# EAGLE board Type-C_Panelized (EAGLE 9.5.2)
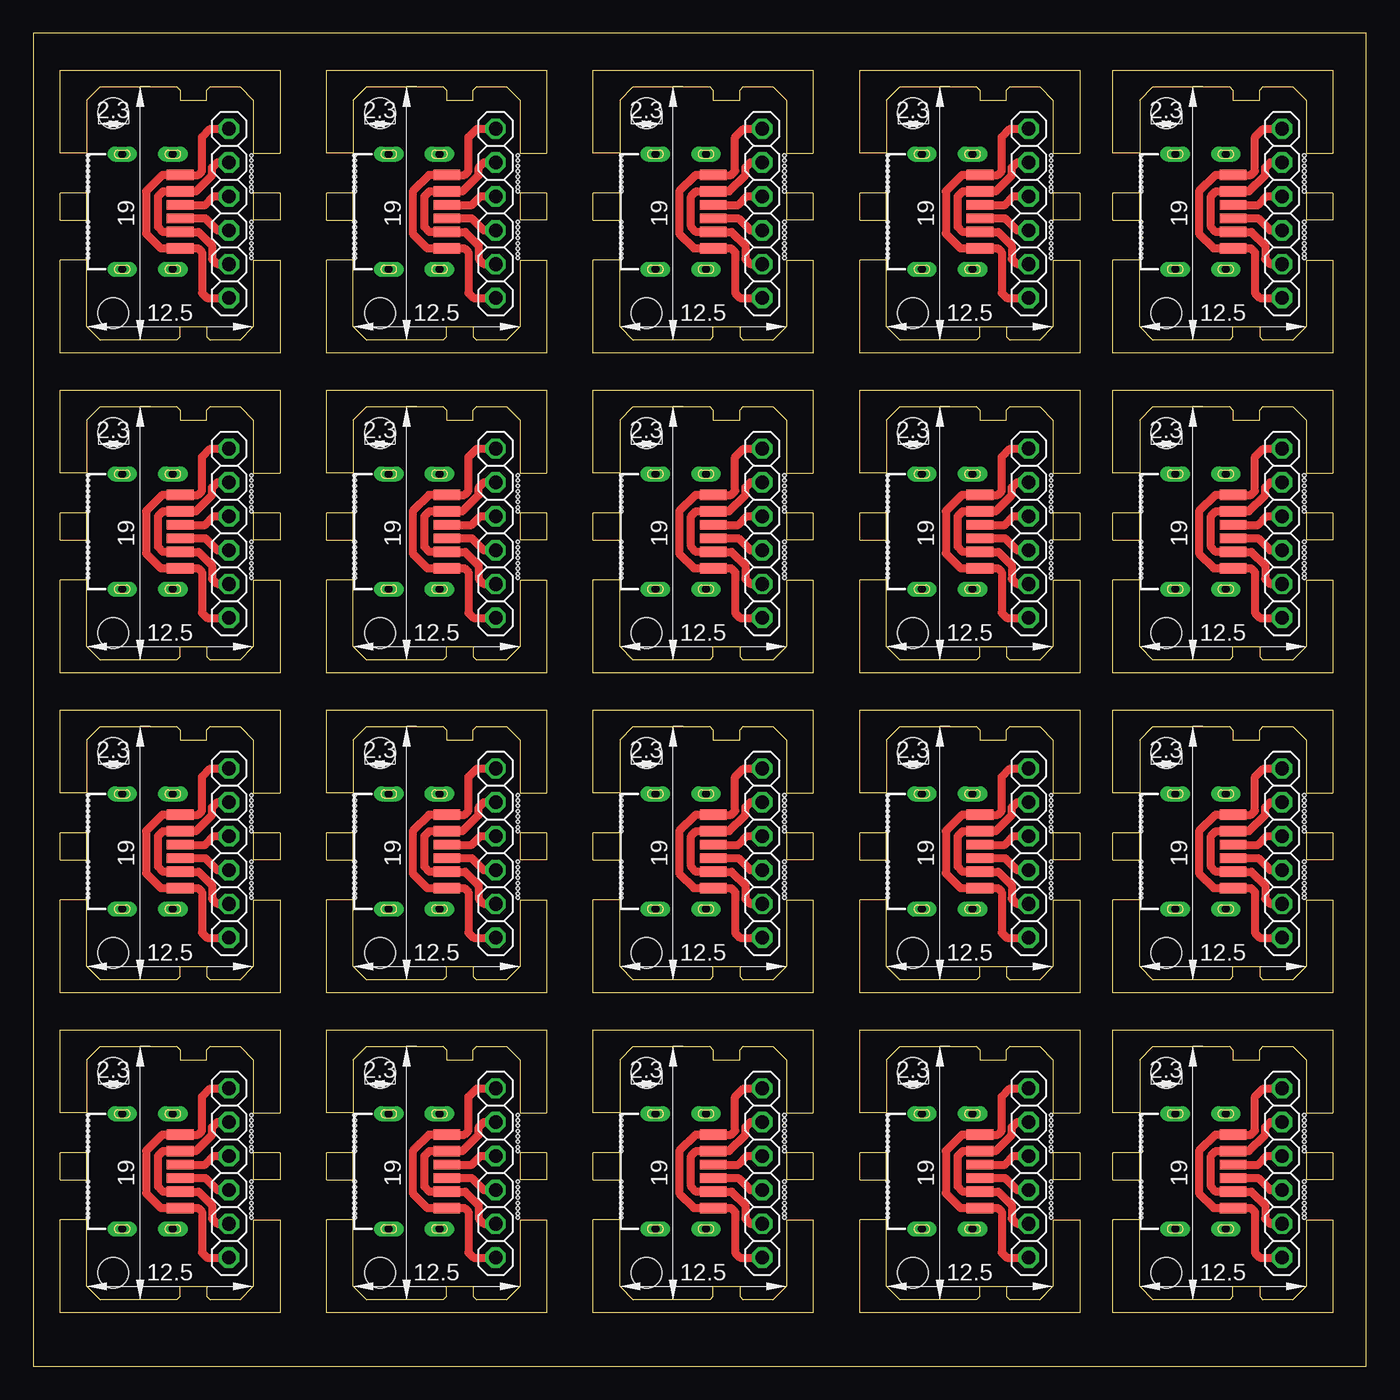
[diagram p0: board, top side]
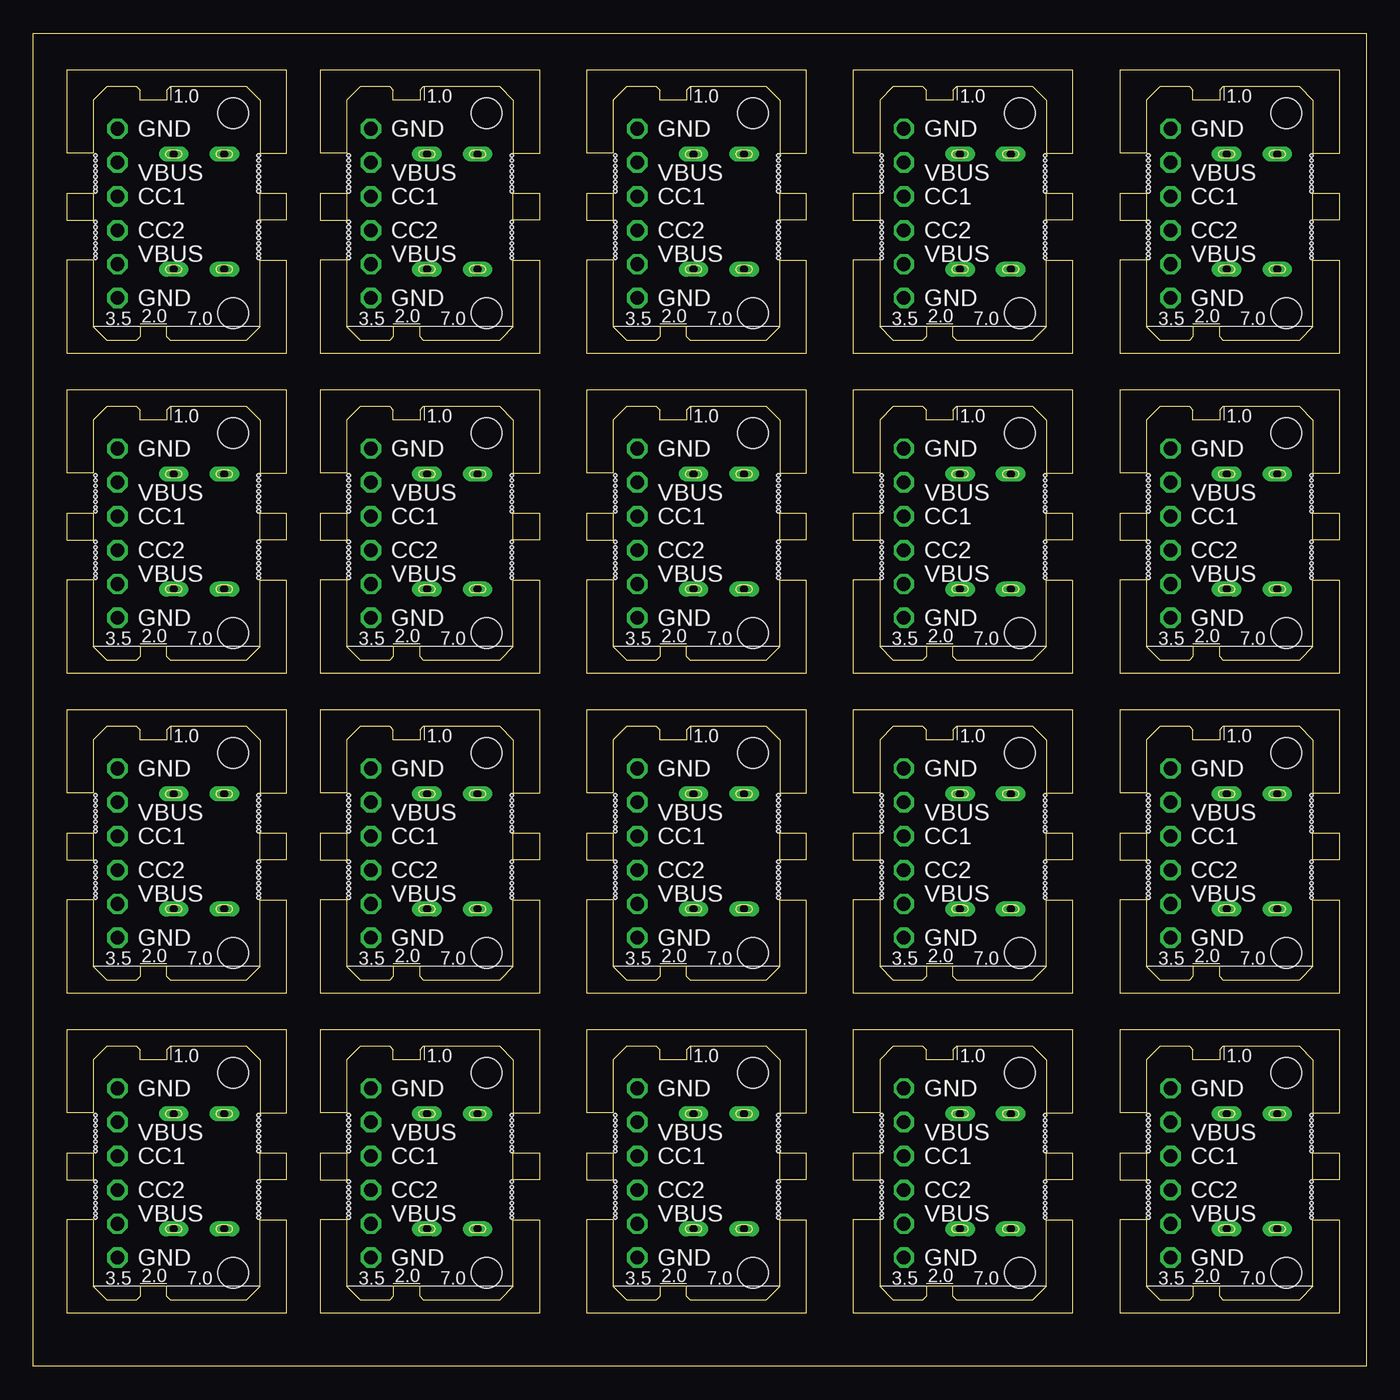
[diagram p1: board, bottom side, seen from below]

Size 100 x 100 mm. Coordinates in mm from the lower left corner, seen from the top.
Outline: 4,78 4,83 2,83 2,76.02 18.5,76.02 18.5,83 16.5,83 16.5,78 15.5,77 13.25,77 13,77.25 13,78 11,78 11,77.25 10.75,77 5,77 4,78
Outline: 4,86 4,88 2,88 2,86 4,86
Outline: 5,96 10.75,96 11,95.75 11,95 13,95 13,95.75 13.25,96 15.5,96 16.5,95 16.5,91 18.5,91 18.5,97.25 2,97.25 2,91 4,91 4,95 5,96
Outline: 16.5,88 16.5,86 18.5,86 18.5,88 16.5,88
Outline: 0,0 100,0 100,100 0,100 0,0
Outline: 24,78 24,83 22,83 22,76.02 38.5,76.02 38.5,83 36.5,83 36.5,78 35.5,77 33.25,77 33,77.25 33,78 31,78 31,77.25 30.75,77 25,77 24,78
Outline: 24,86 24,88 22,88 22,86 24,86
Outline: 25,96 30.75,96 31,95.75 31,95 33,95 33,95.75 33.25,96 35.5,96 36.5,95 36.5,91 38.5,91 38.5,97.25 22,97.25 22,91 24,91 24,95 25,96
Outline: 36.5,88 36.5,86 38.5,86 38.5,88 36.5,88
Outline: 44,78 44,83 42,83 42,76.02 58.5,76.02 58.5,83 56.5,83 56.5,78 55.5,77 53.25,77 53,77.25 53,78 51,78 51,77.25 50.75,77 45,77 44,78
Outline: 44,86 44,88 42,88 42,86 44,86
Outline: 45,96 50.75,96 51,95.75 51,95 53,95 53,95.75 53.25,96 55.5,96 56.5,95 56.5,91 58.5,91 58.5,97.25 42,97.25 42,91 44,91 44,95 45,96
Outline: 56.5,88 56.5,86 58.5,86 58.5,88 56.5,88
Outline: 64,78 64,83 62,83 62,76.02 78.5,76.02 78.5,83 76.5,83 76.5,78 75.5,77 73.25,77 73,77.25 73,78 71,78 71,77.25 70.75,77 65,77 64,78
Outline: 64,86 64,88 62,88 62,86 64,86
Outline: 65,96 70.75,96 71,95.75 71,95 73,95 73,95.75 73.25,96 75.5,96 76.5,95 76.5,91 78.5,91 78.5,97.25 62,97.25 62,91 64,91 64,95 65,96
Outline: 76.5,88 76.5,86 78.5,86 78.5,88 76.5,88
Outline: 83,78 83,83 81,83 81,76.02 97.5,76.02 97.5,83 95.5,83 95.5,78 94.5,77 92.25,77 92,77.25 92,78 90,78 90,77.25 89.75,77 84,77 83,78
Outline: 83,86 83,88 81,88 81,86 83,86
Outline: 84,96 89.75,96 90,95.75 90,95 92,95 92,95.75 92.25,96 94.5,96 95.5,95 95.5,91 97.5,91 97.5,97.25 81,97.25 81,91 83,91 83,95 84,96
Outline: 95.5,88 95.5,86 97.5,86 97.5,88 95.5,88
Outline: 4,54 4,59 2,59 2,52.02 18.5,52.02 18.5,59 16.5,59 16.5,54 15.5,53 13.25,53 13,53.25 13,54 11,54 11,53.25 10.75,53 5,53 4,54
Outline: 4,62 4,64 2,64 2,62 4,62
Outline: 5,72 10.75,72 11,71.75 11,71 13,71 13,71.75 13.25,72 15.5,72 16.5,71 16.5,67 18.5,67 18.5,73.25 2,73.25 2,67 4,67 4,71 5,72
Outline: 16.5,64 16.5,62 18.5,62 18.5,64 16.5,64
Outline: 24,54 24,59 22,59 22,52.02 38.5,52.02 38.5,59 36.5,59 36.5,54 35.5,53 33.25,53 33,53.25 33,54 31,54 31,53.25 30.75,53 25,53 24,54
Outline: 24,62 24,64 22,64 22,62 24,62
Outline: 25,72 30.75,72 31,71.75 31,71 33,71 33,71.75 33.25,72 35.5,72 36.5,71 36.5,67 38.5,67 38.5,73.25 22,73.25 22,67 24,67 24,71 25,72
Outline: 36.5,64 36.5,62 38.5,62 38.5,64 36.5,64
Outline: 44,54 44,59 42,59 42,52.02 58.5,52.02 58.5,59 56.5,59 56.5,54 55.5,53 53.25,53 53,53.25 53,54 51,54 51,53.25 50.75,53 45,53 44,54
Outline: 44,62 44,64 42,64 42,62 44,62
Outline: 45,72 50.75,72 51,71.75 51,71 53,71 53,71.75 53.25,72 55.5,72 56.5,71 56.5,67 58.5,67 58.5,73.25 42,73.25 42,67 44,67 44,71 45,72
Outline: 56.5,64 56.5,62 58.5,62 58.5,64 56.5,64
Outline: 64,54 64,59 62,59 62,52.02 78.5,52.02 78.5,59 76.5,59 76.5,54 75.5,53 73.25,53 73,53.25 73,54 71,54 71,53.25 70.75,53 65,53 64,54
Outline: 64,62 64,64 62,64 62,62 64,62
Outline: 65,72 70.75,72 71,71.75 71,71 73,71 73,71.75 73.25,72 75.5,72 76.5,71 76.5,67 78.5,67 78.5,73.25 62,73.25 62,67 64,67 64,71 65,72
Outline: 76.5,64 76.5,62 78.5,62 78.5,64 76.5,64
Outline: 83,54 83,59 81,59 81,52.02 97.5,52.02 97.5,59 95.5,59 95.5,54 94.5,53 92.25,53 92,53.25 92,54 90,54 90,53.25 89.75,53 84,53 83,54
Outline: 83,62 83,64 81,64 81,62 83,62
Outline: 84,72 89.75,72 90,71.75 90,71 92,71 92,71.75 92.25,72 94.5,72 95.5,71 95.5,67 97.5,67 97.5,73.25 81,73.25 81,67 83,67 83,71 84,72
Outline: 95.5,64 95.5,62 97.5,62 97.5,64 95.5,64
Outline: 4,30 4,35 2,35 2,28.02 18.5,28.02 18.5,35 16.5,35 16.5,30 15.5,29 13.25,29 13,29.25 13,30 11,30 11,29.25 10.75,29 5,29 4,30
Outline: 4,38 4,40 2,40 2,38 4,38
Outline: 5,48 10.75,48 11,47.75 11,47 13,47 13,47.75 13.25,48 15.5,48 16.5,47 16.5,43 18.5,43 18.5,49.25 2,49.25 2,43 4,43 4,47 5,48
Outline: 16.5,40 16.5,38 18.5,38 18.5,40 16.5,40
Outline: 24,30 24,35 22,35 22,28.02 38.5,28.02 38.5,35 36.5,35 36.5,30 35.5,29 33.25,29 33,29.25 33,30 31,30 31,29.25 30.75,29 25,29 24,30
Outline: 24,38 24,40 22,40 22,38 24,38
Outline: 25,48 30.75,48 31,47.75 31,47 33,47 33,47.75 33.25,48 35.5,48 36.5,47 36.5,43 38.5,43 38.5,49.25 22,49.25 22,43 24,43 24,47 25,48
Outline: 36.5,40 36.5,38 38.5,38 38.5,40 36.5,40
Outline: 44,30 44,35 42,35 42,28.02 58.5,28.02 58.5,35 56.5,35 56.5,30 55.5,29 53.25,29 53,29.25 53,30 51,30 51,29.25 50.75,29 45,29 44,30
Outline: 44,38 44,40 42,40 42,38 44,38
Outline: 45,48 50.75,48 51,47.75 51,47 53,47 53,47.75 53.25,48 55.5,48 56.5,47 56.5,43 58.5,43 58.5,49.25 42,49.25 42,43 44,43 44,47 45,48
Outline: 56.5,40 56.5,38 58.5,38 58.5,40 56.5,40
Outline: 64,30 64,35 62,35 62,28.02 78.5,28.02 78.5,35 76.5,35 76.5,30 75.5,29 73.25,29 73,29.25 73,30 71,30 71,29.25 70.75,29 65,29 64,30
Outline: 64,38 64,40 62,40 62,38 64,38
Outline: 65,48 70.75,48 71,47.75 71,47 73,47 73,47.75 73.25,48 75.5,48 76.5,47 76.5,43 78.5,43 78.5,49.25 62,49.25 62,43 64,43 64,47 65,48
Outline: 76.5,40 76.5,38 78.5,38 78.5,40 76.5,40
Outline: 83,30 83,35 81,35 81,28.02 97.5,28.02 97.5,35 95.5,35 95.5,30 94.5,29 92.25,29 92,29.25 92,30 90,30 90,29.25 89.75,29 84,29 83,30
Outline: 83,38 83,40 81,40 81,38 83,38
Outline: 84,48 89.75,48 90,47.75 90,47 92,47 92,47.75 92.25,48 94.5,48 95.5,47 95.5,43 97.5,43 97.5,49.25 81,49.25 81,43 83,43 83,47 84,48
Outline: 95.5,40 95.5,38 97.5,38 97.5,40 95.5,40
Outline: 4,6 4,11 2,11 2,4.02 18.5,4.02 18.5,11 16.5,11 16.5,6 15.5,5 13.25,5 13,5.25 13,6 11,6 11,5.25 10.75,5 5,5 4,6
Outline: 4,14 4,16 2,16 2,14 4,14
Outline: 5,24 10.75,24 11,23.75 11,23 13,23 13,23.75 13.25,24 15.5,24 16.5,23 16.5,19 18.5,19 18.5,25.25 2,25.25 2,19 4,19 4,23 5,24
Outline: 16.5,16 16.5,14 18.5,14 18.5,16 16.5,16
Outline: 24,6 24,11 22,11 22,4.02 38.5,4.02 38.5,11 36.5,11 36.5,6 35.5,5 33.25,5 33,5.25 33,6 31,6 31,5.25 30.75,5 25,5 24,6
Outline: 24,14 24,16 22,16 22,14 24,14
Outline: 25,24 30.75,24 31,23.75 31,23 33,23 33,23.75 33.25,24 35.5,24 36.5,23 36.5,19 38.5,19 38.5,25.25 22,25.25 22,19 24,19 24,23 25,24
Outline: 36.5,16 36.5,14 38.5,14 38.5,16 36.5,16
Outline: 44,6 44,11 42,11 42,4.02 58.5,4.02 58.5,11 56.5,11 56.5,6 55.5,5 53.25,5 53,5.25 53,6 51,6 51,5.25 50.75,5 45,5 44,6
Outline: 44,14 44,16 42,16 42,14 44,14
Outline: 45,24 50.75,24 51,23.75 51,23 53,23 53,23.75 53.25,24 55.5,24 56.5,23 56.5,19 58.5,19 58.5,25.25 42,25.25 42,19 44,19 44,23 45,24
Outline: 56.5,16 56.5,14 58.5,14 58.5,16 56.5,16
Outline: 64,6 64,11 62,11 62,4.02 78.5,4.02 78.5,11 76.5,11 76.5,6 75.5,5 73.25,5 73,5.25 73,6 71,6 71,5.25 70.75,5 65,5 64,6
Outline: 64,14 64,16 62,16 62,14 64,14
Outline: 65,24 70.75,24 71,23.75 71,23 73,23 73,23.75 73.25,24 75.5,24 76.5,23 76.5,19 78.5,19 78.5,25.25 62,25.25 62,19 64,19 64,23 65,24
Outline: 76.5,16 76.5,14 78.5,14 78.5,16 76.5,16
Outline: 83,6 83,11 81,11 81,4.02 97.5,4.02 97.5,11 95.5,11 95.5,6 94.5,5 92.25,5 92,5.25 92,6 90,6 90,5.25 89.75,5 84,5 83,6
Outline: 83,14 83,16 81,16 81,14 83,14
Outline: 84,24 89.75,24 90,23.75 90,23 92,23 92,23.75 92.25,24 94.5,24 95.5,23 95.5,19 97.5,19 97.5,25.25 81,25.25 81,19 83,19 83,23 84,24
Outline: 95.5,16 95.5,14 97.5,14 97.5,16 95.5,16
Copper layers (1*16): Top 0.035mm / dielectric 1.5mm / Bottom 0.035mm
Design rules "default *": minimum track width 6mil, minimum drill 0.35mm, track to track 6mil, track to pad 6mil, pad to pad 6mil, via to via 6mil, smd to smd 6mil, copper to edge 4mil, drill to drill 6mil, minimum pad ring 10mil, minimum via ring 8mil, stop-mask expansion 4mil, vias tented up to drill 0mil, thermal gap 10mil
Holes 2.3 mm at 6,94 6,79 26,94 26,79 46,94 46,79 66,94 66,79 85,94 85,79 6,70 6,55 26,70 26,55 46,70 46,55 66,70 66,55 85,70 85,55 6,46 6,31 26,46 26,31 46,46 46,31 66,46 66,31 85,46 85,31 6,22 6,7 26,22 26,7 46,22 46,7 66,22 66,7 85,22 85,7
Holes 0.25 mm at 4.1,90.85 4.1,90.45 4.1,90.05 4.1,89.65 4.1,89.25 4.1,88.85 4.1,88.45 4.1,88.15 4.1,85.85 4.1,85.45 4.1,85.05 4.1,84.65 4.1,84.25 4.1,83.85 4.1,83.45 4.1,83.15 16.35,90.85 16.35,90.45 16.35,90.05 16.35,89.65 16.35,89.25 16.35,88.85 16.35,88.45 16.35,88.15 16.35,85.85 16.35,85.45 16.35,85.05 16.35,84.65 16.35,84.25 16.35,83.85 16.35,83.45 16.35,83.15 24.1,90.85 24.1,90.45 24.1,90.05 24.1,89.65 24.1,89.25 24.1,88.85 24.1,88.45 24.1,88.15 24.1,85.85 24.1,85.45 24.1,85.05 24.1,84.65 24.1,84.25 24.1,83.85 24.1,83.45 24.1,83.15 36.35,90.85 36.35,90.45 36.35,90.05 36.35,89.65 36.35,89.25 36.35,88.85 36.35,88.45 36.35,88.15 36.35,85.85 36.35,85.45 36.35,85.05 36.35,84.65 36.35,84.25 36.35,83.85 36.35,83.45 36.35,83.15 44.1,90.85 44.1,90.45 44.1,90.05 44.1,89.65 44.1,89.25 44.1,88.85 44.1,88.45 44.1,88.15 44.1,85.85 44.1,85.45 44.1,85.05 44.1,84.65 44.1,84.25 44.1,83.85 44.1,83.45 44.1,83.15 56.35,90.85 56.35,90.45 56.35,90.05 56.35,89.65 56.35,89.25 56.35,88.85 56.35,88.45 56.35,88.15 56.35,85.85 56.35,85.45 56.35,85.05 56.35,84.65 56.35,84.25 56.35,83.85 56.35,83.45 56.35,83.15 64.1,90.85 64.1,90.45 64.1,90.05 64.1,89.65 64.1,89.25 64.1,88.85 64.1,88.45 64.1,88.15 64.1,85.85 64.1,85.45 64.1,85.05 64.1,84.65 64.1,84.25 64.1,83.85 64.1,83.45 64.1,83.15 76.35,90.85 76.35,90.45 76.35,90.05 76.35,89.65 76.35,89.25 76.35,88.85 76.35,88.45 76.35,88.15 76.35,85.85 76.35,85.45 76.35,85.05 76.35,84.65 76.35,84.25 76.35,83.85 76.35,83.45 76.35,83.15 83.1,90.85 83.1,90.45 83.1,90.05 83.1,89.65 83.1,89.25 83.1,88.85 83.1,88.45 83.1,88.15 83.1,85.85 83.1,85.45 83.1,85.05 83.1,84.65 83.1,84.25 83.1,83.85 83.1,83.45 83.1,83.15 95.35,90.85 95.35,90.45 95.35,90.05 95.35,89.65 95.35,89.25 95.35,88.85 95.35,88.45 95.35,88.15 95.35,85.85 95.35,85.45 95.35,85.05 95.35,84.65 95.35,84.25 95.35,83.85 95.35,83.45 95.35,83.15 4.1,66.85 4.1,66.45 4.1,66.05 4.1,65.65 4.1,65.25 4.1,64.85 4.1,64.45 4.1,64.15 4.1,61.85 4.1,61.45 4.1,61.05 4.1,60.65 4.1,60.25 4.1,59.85 4.1,59.45 4.1,59.15 16.35,66.85 16.35,66.45 16.35,66.05 16.35,65.65 16.35,65.25 16.35,64.85 16.35,64.45 16.35,64.15 16.35,61.85 16.35,61.45 16.35,61.05 16.35,60.65 16.35,60.25 16.35,59.85 16.35,59.45 16.35,59.15 24.1,66.85 24.1,66.45 24.1,66.05 24.1,65.65 24.1,65.25 24.1,64.85 24.1,64.45 24.1,64.15 24.1,61.85 24.1,61.45 24.1,61.05 24.1,60.65 24.1,60.25 24.1,59.85 24.1,59.45 24.1,59.15 36.35,66.85 36.35,66.45 36.35,66.05 36.35,65.65 36.35,65.25 36.35,64.85 36.35,64.45 36.35,64.15 36.35,61.85 36.35,61.45 36.35,61.05 36.35,60.65 36.35,60.25 36.35,59.85 36.35,59.45 36.35,59.15 44.1,66.85 44.1,66.45 44.1,66.05 44.1,65.65 44.1,65.25 44.1,64.85 44.1,64.45 44.1,64.15 44.1,61.85 44.1,61.45 44.1,61.05 44.1,60.65 44.1,60.25 44.1,59.85 44.1,59.45 44.1,59.15 56.35,66.85 56.35,66.45 56.35,66.05 56.35,65.65 56.35,65.25 56.35,64.85 56.35,64.45 56.35,64.15 56.35,61.85 56.35,61.45 56.35,61.05 56.35,60.65 56.35,60.25 56.35,59.85 56.35,59.45 56.35,59.15 64.1,66.85 64.1,66.45 64.1,66.05 64.1,65.65 64.1,65.25 64.1,64.85 64.1,64.45 64.1,64.15 64.1,61.85 64.1,61.45 64.1,61.05 64.1,60.65 64.1,60.25 64.1,59.85 64.1,59.45 64.1,59.15 76.35,66.85 76.35,66.45 76.35,66.05 76.35,65.65 76.35,65.25 76.35,64.85 76.35,64.45 76.35,64.15 76.35,61.85 76.35,61.45 76.35,61.05 76.35,60.65 76.35,60.25 76.35,59.85 76.35,59.45 76.35,59.15 83.1,66.85 83.1,66.45 83.1,66.05 83.1,65.65 83.1,65.25 83.1,64.85 83.1,64.45 83.1,64.15 83.1,61.85 83.1,61.45 83.1,61.05 83.1,60.65 83.1,60.25 83.1,59.85 83.1,59.45 83.1,59.15 95.35,66.85 95.35,66.45 95.35,66.05 95.35,65.65 95.35,65.25 95.35,64.85 95.35,64.45 95.35,64.15 95.35,61.85 95.35,61.45 95.35,61.05 95.35,60.65 95.35,60.25 95.35,59.85 95.35,59.45 95.35,59.15 4.1,42.85 4.1,42.45 4.1,42.05 4.1,41.65 4.1,41.25 4.1,40.85 4.1,40.45 4.1,40.15 4.1,37.85 4.1,37.45 4.1,37.05 4.1,36.65 4.1,36.25 4.1,35.85 4.1,35.45 4.1,35.15 16.35,42.85 16.35,42.45 16.35,42.05 16.35,41.65 16.35,41.25 16.35,40.85 16.35,40.45 16.35,40.15 16.35,37.85 16.35,37.45 16.35,37.05 16.35,36.65 16.35,36.25 16.35,35.85 16.35,35.45 16.35,35.15 24.1,42.85 24.1,42.45 24.1,42.05 24.1,41.65 24.1,41.25 24.1,40.85 24.1,40.45 24.1,40.15 24.1,37.85 24.1,37.45 24.1,37.05 24.1,36.65 24.1,36.25 24.1,35.85 24.1,35.45 24.1,35.15 36.35,42.85 36.35,42.45 36.35,42.05 36.35,41.65 36.35,41.25 36.35,40.85 36.35,40.45 36.35,40.15 36.35,37.85 36.35,37.45 36.35,37.05 36.35,36.65 36.35,36.25 36.35,35.85 36.35,35.45 36.35,35.15 44.1,42.85 44.1,42.45 44.1,42.05 44.1,41.65 44.1,41.25 44.1,40.85 44.1,40.45 44.1,40.15 44.1,37.85 44.1,37.45 44.1,37.05 44.1,36.65 44.1,36.25 44.1,35.85 44.1,35.45 44.1,35.15 56.35,42.85 56.35,42.45 56.35,42.05 56.35,41.65 56.35,41.25 56.35,40.85 56.35,40.45 56.35,40.15 56.35,37.85 56.35,37.45 56.35,37.05 56.35,36.65 56.35,36.25 56.35,35.85 56.35,35.45 56.35,35.15 64.1,42.85 64.1,42.45 64.1,42.05 64.1,41.65 64.1,41.25 64.1,40.85 64.1,40.45 64.1,40.15 64.1,37.85 64.1,37.45 64.1,37.05 64.1,36.65 64.1,36.25 64.1,35.85 64.1,35.45 64.1,35.15 76.35,42.85 76.35,42.45 76.35,42.05 76.35,41.65 76.35,41.25 76.35,40.85 76.35,40.45 76.35,40.15 76.35,37.85 76.35,37.45 76.35,37.05 76.35,36.65 76.35,36.25 76.35,35.85 76.35,35.45 76.35,35.15 83.1,42.85 83.1,42.45 83.1,42.05 83.1,41.65 83.1,41.25 83.1,40.85 83.1,40.45 83.1,40.15 83.1,37.85 83.1,37.45 83.1,37.05 83.1,36.65 83.1,36.25 83.1,35.85 83.1,35.45 83.1,35.15 95.35,42.85 95.35,42.45 95.35,42.05 95.35,41.65 95.35,41.25 95.35,40.85 95.35,40.45 95.35,40.15 95.35,37.85 95.35,37.45 95.35,37.05 95.35,36.65 95.35,36.25 95.35,35.85 95.35,35.45 95.35,35.15 4.1,18.85 4.1,18.45 4.1,18.05 4.1,17.65 4.1,17.25 4.1,16.85 4.1,16.45 4.1,16.15 4.1,13.85 4.1,13.45 4.1,13.05 4.1,12.65 4.1,12.25 4.1,11.85 4.1,11.45 4.1,11.15 16.35,18.85 16.35,18.45 16.35,18.05 16.35,17.65 16.35,17.25 16.35,16.85 16.35,16.45 16.35,16.15 16.35,13.85 16.35,13.45 16.35,13.05 16.35,12.65 16.35,12.25 16.35,11.85 16.35,11.45 16.35,11.15 24.1,18.85 24.1,18.45 24.1,18.05 24.1,17.65 24.1,17.25 24.1,16.85 24.1,16.45 24.1,16.15 24.1,13.85 24.1,13.45 24.1,13.05 24.1,12.65 24.1,12.25 24.1,11.85 24.1,11.45 24.1,11.15 36.35,18.85 36.35,18.45 36.35,18.05 36.35,17.65 36.35,17.25 36.35,16.85 36.35,16.45 36.35,16.15 36.35,13.85 36.35,13.45 36.35,13.05 36.35,12.65 36.35,12.25 36.35,11.85 36.35,11.45 36.35,11.15 44.1,18.85 44.1,18.45 44.1,18.05 44.1,17.65 44.1,17.25 44.1,16.85 44.1,16.45 44.1,16.15 44.1,13.85 44.1,13.45 44.1,13.05 44.1,12.65 44.1,12.25 44.1,11.85 44.1,11.45 44.1,11.15 56.35,18.85 56.35,18.45 56.35,18.05 56.35,17.65 56.35,17.25 56.35,16.85 56.35,16.45 56.35,16.15 56.35,13.85 56.35,13.45 56.35,13.05 56.35,12.65 56.35,12.25 56.35,11.85 56.35,11.45 56.35,11.15 64.1,18.85 64.1,18.45 64.1,18.05 64.1,17.65 64.1,17.25 64.1,16.85 64.1,16.45 64.1,16.15 64.1,13.85 64.1,13.45 64.1,13.05 64.1,12.65 64.1,12.25 64.1,11.85 64.1,11.45 64.1,11.15 76.35,18.85 76.35,18.45 76.35,18.05 76.35,17.65 76.35,17.25 76.35,16.85 76.35,16.45 76.35,16.15 76.35,13.85 76.35,13.45 76.35,13.05 76.35,12.65 76.35,12.25 76.35,11.85 76.35,11.45 76.35,11.15 83.1,18.85 83.1,18.45 83.1,18.05 83.1,17.65 83.1,17.25 83.1,16.85 83.1,16.45 83.1,16.15 83.1,13.85 83.1,13.45 83.1,13.05 83.1,12.65 83.1,12.25 83.1,11.85 83.1,11.45 83.1,11.15 95.35,18.85 95.35,18.45 95.35,18.05 95.35,17.65 95.35,17.25 95.35,16.85 95.35,16.45 95.35,16.15 95.35,13.85 95.35,13.45 95.35,13.05 95.35,12.65 95.35,12.25 95.35,11.85 95.35,11.45 95.35,11.15

## Footprints (pad centres in the part's own frame; a part is rotated, then mirrored left to right if it is on the bottom)
TYPE-C-31-M-17 = smd 0.7 x 2: CC1 -0.5,0.4; CC2 0.5,0.4 | smd 0.8 x 2: GND -2.75,0.4; GND_2 2.75,0.4 | drill 0.6 pad 1.1 long: P$1 4.32,-3.95; P$2 4.32,-0.15; P$3 -4.32,-0.15; P$4 -4.32,-3.95 | smd 0.76 x 2: VBUS -1.52,0.4; VBUS_2 1.52,0.4
1X06/OCT = drill 1.016 octagon: 1 -6.35,0; 2 -3.81,0; 3 -1.27,0; 4 1.27,0; 5 3.81,0; 6 6.35,0

## Placement (x,y rotation side)
J1  TYPE-C-31-M-17  [TYPE-C-31-M-17]  10.62,86.62 270 top
J2  TYPE-C-31-M-17  [TYPE-C-31-M-17]  30.62,86.62 270 top
J3  TYPE-C-31-M-17  [TYPE-C-31-M-17]  50.62,86.62 270 top
J4  TYPE-C-31-M-17  [TYPE-C-31-M-17]  70.62,86.62 270 top
J5  TYPE-C-31-M-17  [TYPE-C-31-M-17]  89.62,86.62 270 top
J6  TYPE-C-31-M-17  [TYPE-C-31-M-17]  10.62,62.62 270 top
J7  TYPE-C-31-M-17  [TYPE-C-31-M-17]  30.62,62.62 270 top
J8  TYPE-C-31-M-17  [TYPE-C-31-M-17]  50.62,62.62 270 top
J9  TYPE-C-31-M-17  [TYPE-C-31-M-17]  70.62,62.62 270 top
J10  TYPE-C-31-M-17  [TYPE-C-31-M-17]  89.62,62.62 270 top
J11  TYPE-C-31-M-17  [TYPE-C-31-M-17]  10.62,38.62 270 top
J12  TYPE-C-31-M-17  [TYPE-C-31-M-17]  30.62,38.62 270 top
J13  TYPE-C-31-M-17  [TYPE-C-31-M-17]  50.62,38.62 270 top
J14  TYPE-C-31-M-17  [TYPE-C-31-M-17]  70.62,38.62 270 top
J15  TYPE-C-31-M-17  [TYPE-C-31-M-17]  89.62,38.62 270 top
J16  TYPE-C-31-M-17  [TYPE-C-31-M-17]  10.62,14.62 270 top
J17  TYPE-C-31-M-17  [TYPE-C-31-M-17]  30.62,14.62 270 top
J18  TYPE-C-31-M-17  [TYPE-C-31-M-17]  50.62,14.62 270 top
J19  TYPE-C-31-M-17  [TYPE-C-31-M-17]  70.62,14.62 270 top
J20  TYPE-C-31-M-17  [TYPE-C-31-M-17]  89.62,14.62 270 top
JP1  [1X06/OCT]  14.68,86.49 90 top
JP2  [1X06/OCT]  34.68,86.49 90 top
JP3  [1X06/OCT]  54.68,86.49 90 top
JP4  [1X06/OCT]  74.68,86.49 90 top
JP5  [1X06/OCT]  93.68,86.49 90 top
JP6  [1X06/OCT]  14.68,62.49 90 top
JP7  [1X06/OCT]  34.68,62.49 90 top
JP8  [1X06/OCT]  54.68,62.49 90 top
JP9  [1X06/OCT]  74.68,62.49 90 top
JP10  [1X06/OCT]  93.68,62.49 90 top
JP11  [1X06/OCT]  14.68,38.49 90 top
JP12  [1X06/OCT]  34.68,38.49 90 top
JP13  [1X06/OCT]  54.68,38.49 90 top
JP14  [1X06/OCT]  74.68,38.49 90 top
JP15  [1X06/OCT]  93.68,38.49 90 top
JP16  [1X06/OCT]  14.68,14.49 90 top
JP17  [1X06/OCT]  34.68,14.49 90 top
JP18  [1X06/OCT]  54.68,14.49 90 top
JP19  [1X06/OCT]  74.68,14.49 90 top
JP20  [1X06/OCT]  93.68,14.49 90 top

## Library data of the parts
J1-J20 = angrypig7_Library
JP1-JP20 = pinhead_v2

## Nets
N$1: J1.VBUS J1.VBUS_2 JP1.2 JP1.5
N$2: J1.GND J1.GND_2 JP1.1 JP1.6
N$3: J1.CC1 JP1.4
N$4: J1.CC2 JP1.3
N$5: J2.VBUS J2.VBUS_2 JP2.2 JP2.5
N$6: J2.GND J2.GND_2 JP2.1 JP2.6
N$7: J2.CC1 JP2.4
N$8: J2.CC2 JP2.3
N$9: J3.VBUS J3.VBUS_2 JP3.2 JP3.5
N$10: J3.GND J3.GND_2 JP3.1 JP3.6
N$11: J3.CC1 JP3.4
N$12: J3.CC2 JP3.3
N$13: J4.VBUS J4.VBUS_2 JP4.2 JP4.5
N$14: J4.GND J4.GND_2 JP4.1 JP4.6
N$15: J4.CC1 JP4.4
N$16: J4.CC2 JP4.3
N$17: J5.VBUS J5.VBUS_2 JP5.2 JP5.5
N$18: J5.GND J5.GND_2 JP5.1 JP5.6
N$19: J5.CC1 JP5.4
N$20: J5.CC2 JP5.3
N$21: J6.VBUS J6.VBUS_2 JP6.2 JP6.5
N$22: J6.GND J6.GND_2 JP6.1 JP6.6
N$23: J6.CC1 JP6.4
N$24: J6.CC2 JP6.3
N$25: J7.VBUS J7.VBUS_2 JP7.2 JP7.5
N$26: J7.GND J7.GND_2 JP7.1 JP7.6
N$27: J7.CC1 JP7.4
N$28: J7.CC2 JP7.3
N$29: J8.VBUS J8.VBUS_2 JP8.2 JP8.5
N$30: J8.GND J8.GND_2 JP8.1 JP8.6
N$31: J8.CC1 JP8.4
N$32: J8.CC2 JP8.3
N$33: J9.VBUS J9.VBUS_2 JP9.2 JP9.5
N$34: J9.GND J9.GND_2 JP9.1 JP9.6
N$35: J9.CC1 JP9.4
N$36: J9.CC2 JP9.3
N$37: J10.VBUS J10.VBUS_2 JP10.2 JP10.5
N$38: J10.GND J10.GND_2 JP10.1 JP10.6
N$39: J10.CC1 JP10.4
N$40: J10.CC2 JP10.3
N$41: J11.VBUS J11.VBUS_2 JP11.2 JP11.5
N$42: J11.GND J11.GND_2 JP11.1 JP11.6
N$43: J11.CC1 JP11.4
N$44: J11.CC2 JP11.3
N$45: J12.VBUS J12.VBUS_2 JP12.2 JP12.5
N$46: J12.GND J12.GND_2 JP12.1 JP12.6
N$47: J12.CC1 JP12.4
N$48: J12.CC2 JP12.3
N$49: J13.VBUS J13.VBUS_2 JP13.2 JP13.5
N$50: J13.GND J13.GND_2 JP13.1 JP13.6
N$51: J13.CC1 JP13.4
N$52: J13.CC2 JP13.3
N$53: J14.VBUS J14.VBUS_2 JP14.2 JP14.5
N$54: J14.GND J14.GND_2 JP14.1 JP14.6
N$55: J14.CC1 JP14.4
N$56: J14.CC2 JP14.3
N$57: J15.VBUS J15.VBUS_2 JP15.2 JP15.5
N$58: J15.GND J15.GND_2 JP15.1 JP15.6
N$59: J15.CC1 JP15.4
N$60: J15.CC2 JP15.3
N$61: J16.VBUS J16.VBUS_2 JP16.2 JP16.5
N$62: J16.GND J16.GND_2 JP16.1 JP16.6
N$63: J16.CC1 JP16.4
N$64: J16.CC2 JP16.3
N$65: J17.VBUS J17.VBUS_2 JP17.2 JP17.5
N$66: J17.GND J17.GND_2 JP17.1 JP17.6
N$67: J17.CC1 JP17.4
N$68: J17.CC2 JP17.3
N$69: J18.VBUS J18.VBUS_2 JP18.2 JP18.5
N$70: J18.GND J18.GND_2 JP18.1 JP18.6
N$71: J18.CC1 JP18.4
N$72: J18.CC2 JP18.3
N$73: J19.VBUS J19.VBUS_2 JP19.2 JP19.5
N$74: J19.GND J19.GND_2 JP19.1 JP19.6
N$75: J19.CC1 JP19.4
N$76: J19.CC2 JP19.3
N$77: J20.VBUS J20.VBUS_2 JP20.2 JP20.5
N$78: J20.GND J20.GND_2 JP20.1 JP20.6
N$79: J20.CC1 JP20.4
N$80: J20.CC2 JP20.3

## Tracks (layer width: path | path; a pad name or v marks a point on that pad's centre or on a via)
N$1
  Top 0.61: JP1.2 13.79,82.68 13.41,83.06 13.41,84.08 12.39,85.1 J1.VBUS_2 9.73,85.1 9.35,85.48 9.35,87.76 9.73,88.14 J1.VBUS 12.2,88.14 13.41,89.35 13.41,89.92 13.79,90.3 JP1.5
N$2
  Top 0.61: JP1.1 13.03,80.14 12.65,80.52 12.65,83.57 12.35,83.87 J1.GND_2 9.56,83.87 8.46,84.97 8.46,88.14 9.69,89.37 J1.GND 12.35,89.37 12.65,89.67 12.65,92.21 13.29,92.84 JP1.6
N$3
  Top 0.61: J1.CC1 12.9,87.12 13.54,87.76 JP1.4
N$4
  Top 0.61: J1.CC2 12.9,86.12 13.79,85.22 JP1.3
N$5
  Top 0.61: JP2.2 33.8,82.68 33.41,83.06 33.41,84.08 32.39,85.1 J2.VBUS_2 29.73,85.1 29.35,85.48 29.35,87.76 29.73,88.14 J2.VBUS 32.2,88.14 33.41,89.35 33.41,89.92 33.8,90.3 JP2.5
N$6
  Top 0.61: JP2.1 33.03,80.14 32.65,80.52 32.65,83.57 32.35,83.87 J2.GND_2 29.56,83.87 28.46,84.97 28.46,88.14 29.69,89.37 J2.GND 32.35,89.37 32.65,89.67 32.65,92.21 33.29,92.84 JP2.6
N$7
  Top 0.61: J2.CC1 32.9,87.12 33.54,87.76 JP2.4
N$8
  Top 0.61: J2.CC2 32.9,86.12 33.8,85.22 JP2.3
N$9
  Top 0.61: JP3.2 53.8,82.68 53.41,83.06 53.41,84.08 52.39,85.1 J3.VBUS_2 49.73,85.1 49.35,85.48 49.35,87.76 49.73,88.14 J3.VBUS 52.2,88.14 53.41,89.35 53.41,89.92 53.8,90.3 JP3.5
N$10
  Top 0.61: JP3.1 53.03,80.14 52.65,80.52 52.65,83.57 52.35,83.87 J3.GND_2 49.56,83.87 48.46,84.97 48.46,88.14 49.69,89.37 J3.GND 52.35,89.37 52.65,89.67 52.65,92.21 53.29,92.84 JP3.6
N$11
  Top 0.61: J3.CC1 52.9,87.12 53.54,87.76 JP3.4
N$12
  Top 0.61: J3.CC2 52.9,86.12 53.8,85.22 JP3.3
N$13
  Top 0.61: JP4.2 73.8,82.68 73.41,83.06 73.41,84.08 72.39,85.1 J4.VBUS_2 69.73,85.1 69.35,85.48 69.35,87.76 69.73,88.14 J4.VBUS 72.2,88.14 73.41,89.35 73.41,89.92 73.8,90.3 JP4.5
N$14
  Top 0.61: JP4.1 73.03,80.14 72.65,80.52 72.65,83.57 72.35,83.87 J4.GND_2 69.56,83.87 68.46,84.97 68.46,88.14 69.69,89.37 J4.GND 72.35,89.37 72.65,89.67 72.65,92.21 73.29,92.84 JP4.6
N$15
  Top 0.61: J4.CC1 72.9,87.12 73.54,87.76 JP4.4
N$16
  Top 0.61: J4.CC2 72.9,86.12 73.8,85.22 JP4.3
N$17
  Top 0.61: JP5.2 92.8,82.68 92.41,83.06 92.41,84.08 91.39,85.1 J5.VBUS_2 88.73,85.1 88.35,85.48 88.35,87.76 88.73,88.14 J5.VBUS 91.2,88.14 92.41,89.35 92.41,89.92 92.8,90.3 JP5.5
N$18
  Top 0.61: JP5.1 92.03,80.14 91.65,80.52 91.65,83.57 91.35,83.87 J5.GND_2 88.56,83.87 87.46,84.97 87.46,88.14 88.69,89.37 J5.GND 91.35,89.37 91.65,89.67 91.65,92.21 92.29,92.84 JP5.6
N$19
  Top 0.61: J5.CC1 91.9,87.12 92.54,87.76 JP5.4
N$20
  Top 0.61: J5.CC2 91.9,86.12 92.8,85.22 JP5.3
N$21
  Top 0.61: JP6.2 13.79,58.68 13.41,59.06 13.41,60.08 12.39,61.1 J6.VBUS_2 9.73,61.1 9.35,61.48 9.35,63.76 9.73,64.14 J6.VBUS 12.2,64.14 13.41,65.35 13.41,65.92 13.79,66.3 JP6.5
N$22
  Top 0.61: JP6.1 13.03,56.14 12.65,56.52 12.65,59.57 12.35,59.87 J6.GND_2 9.56,59.87 8.46,60.97 8.46,64.14 9.69,65.37 J6.GND 12.35,65.37 12.65,65.67 12.65,68.21 13.29,68.84 JP6.6
N$23
  Top 0.61: J6.CC1 12.9,63.12 13.54,63.76 JP6.4
N$24
  Top 0.61: J6.CC2 12.9,62.12 13.79,61.22 JP6.3
N$25
  Top 0.61: JP7.2 33.8,58.68 33.41,59.06 33.41,60.08 32.39,61.1 J7.VBUS_2 29.73,61.1 29.35,61.48 29.35,63.76 29.73,64.14 J7.VBUS 32.2,64.14 33.41,65.35 33.41,65.92 33.8,66.3 JP7.5
N$26
  Top 0.61: JP7.1 33.03,56.14 32.65,56.52 32.65,59.57 32.35,59.87 J7.GND_2 29.56,59.87 28.46,60.97 28.46,64.14 29.69,65.37 J7.GND 32.35,65.37 32.65,65.67 32.65,68.21 33.29,68.84 JP7.6
N$27
  Top 0.61: J7.CC1 32.9,63.12 33.54,63.76 JP7.4
N$28
  Top 0.61: J7.CC2 32.9,62.12 33.8,61.22 JP7.3
N$29
  Top 0.61: JP8.2 53.8,58.68 53.41,59.06 53.41,60.08 52.39,61.1 J8.VBUS_2 49.73,61.1 49.35,61.48 49.35,63.76 49.73,64.14 J8.VBUS 52.2,64.14 53.41,65.35 53.41,65.92 53.8,66.3 JP8.5
N$30
  Top 0.61: JP8.1 53.03,56.14 52.65,56.52 52.65,59.57 52.35,59.87 J8.GND_2 49.56,59.87 48.46,60.97 48.46,64.14 49.69,65.37 J8.GND 52.35,65.37 52.65,65.67 52.65,68.21 53.29,68.84 JP8.6
N$31
  Top 0.61: J8.CC1 52.9,63.12 53.54,63.76 JP8.4
N$32
  Top 0.61: J8.CC2 52.9,62.12 53.8,61.22 JP8.3
N$33
  Top 0.61: JP9.2 73.8,58.68 73.41,59.06 73.41,60.08 72.39,61.1 J9.VBUS_2 69.73,61.1 69.35,61.48 69.35,63.76 69.73,64.14 J9.VBUS 72.2,64.14 73.41,65.35 73.41,65.92 73.8,66.3 JP9.5
N$34
  Top 0.61: JP9.1 73.03,56.14 72.65,56.52 72.65,59.57 72.35,59.87 J9.GND_2 69.56,59.87 68.46,60.97 68.46,64.14 69.69,65.37 J9.GND 72.35,65.37 72.65,65.67 72.65,68.21 73.29,68.84 JP9.6
N$35
  Top 0.61: J9.CC1 72.9,63.12 73.54,63.76 JP9.4
N$36
  Top 0.61: J9.CC2 72.9,62.12 73.8,61.22 JP9.3
N$37
  Top 0.61: JP10.2 92.8,58.68 92.41,59.06 92.41,60.08 91.39,61.1 J10.VBUS_2 88.73,61.1 88.35,61.48 88.35,63.76 88.73,64.14 J10.VBUS 91.2,64.14 92.41,65.35 92.41,65.92 92.8,66.3 JP10.5
N$38
  Top 0.61: JP10.1 92.03,56.14 91.65,56.52 91.65,59.57 91.35,59.87 J10.GND_2 88.56,59.87 87.46,60.97 87.46,64.14 88.69,65.37 J10.GND 91.35,65.37 91.65,65.67 91.65,68.21 92.29,68.84 JP10.6
N$39
  Top 0.61: J10.CC1 91.9,63.12 92.54,63.76 JP10.4
N$40
  Top 0.61: J10.CC2 91.9,62.12 92.8,61.22 JP10.3
N$41
  Top 0.61: JP11.2 13.79,34.68 13.41,35.06 13.41,36.08 12.39,37.1 J11.VBUS_2 9.73,37.1 9.35,37.48 9.35,39.76 9.73,40.14 J11.VBUS 12.2,40.14 13.41,41.35 13.41,41.92 13.79,42.3 JP11.5
N$42
  Top 0.61: JP11.1 13.03,32.14 12.65,32.52 12.65,35.57 12.35,35.87 J11.GND_2 9.56,35.87 8.46,36.97 8.46,40.14 9.69,41.37 J11.GND 12.35,41.37 12.65,41.67 12.65,44.21 13.29,44.84 JP11.6
N$43
  Top 0.61: J11.CC1 12.9,39.12 13.54,39.76 JP11.4
N$44
  Top 0.61: J11.CC2 12.9,38.12 13.79,37.22 JP11.3
N$45
  Top 0.61: JP12.2 33.8,34.68 33.41,35.06 33.41,36.08 32.39,37.1 J12.VBUS_2 29.73,37.1 29.35,37.48 29.35,39.76 29.73,40.14 J12.VBUS 32.2,40.14 33.41,41.35 33.41,41.92 33.8,42.3 JP12.5
N$46
  Top 0.61: JP12.1 33.03,32.14 32.65,32.52 32.65,35.57 32.35,35.87 J12.GND_2 29.56,35.87 28.46,36.97 28.46,40.14 29.69,41.37 J12.GND 32.35,41.37 32.65,41.67 32.65,44.21 33.29,44.84 JP12.6
N$47
  Top 0.61: J12.CC1 32.9,39.12 33.54,39.76 JP12.4
N$48
  Top 0.61: J12.CC2 32.9,38.12 33.8,37.22 JP12.3
N$49
  Top 0.61: JP13.2 53.8,34.68 53.41,35.06 53.41,36.08 52.39,37.1 J13.VBUS_2 49.73,37.1 49.35,37.48 49.35,39.76 49.73,40.14 J13.VBUS 52.2,40.14 53.41,41.35 53.41,41.92 53.8,42.3 JP13.5
N$50
  Top 0.61: JP13.1 53.03,32.14 52.65,32.52 52.65,35.57 52.35,35.87 J13.GND_2 49.56,35.87 48.46,36.97 48.46,40.14 49.69,41.37 J13.GND 52.35,41.37 52.65,41.67 52.65,44.21 53.29,44.84 JP13.6
N$51
  Top 0.61: J13.CC1 52.9,39.12 53.54,39.76 JP13.4
N$52
  Top 0.61: J13.CC2 52.9,38.12 53.8,37.22 JP13.3
N$53
  Top 0.61: JP14.2 73.8,34.68 73.41,35.06 73.41,36.08 72.39,37.1 J14.VBUS_2 69.73,37.1 69.35,37.48 69.35,39.76 69.73,40.14 J14.VBUS 72.2,40.14 73.41,41.35 73.41,41.92 73.8,42.3 JP14.5
N$54
  Top 0.61: JP14.1 73.03,32.14 72.65,32.52 72.65,35.57 72.35,35.87 J14.GND_2 69.56,35.87 68.46,36.97 68.46,40.14 69.69,41.37 J14.GND 72.35,41.37 72.65,41.67 72.65,44.21 73.29,44.84 JP14.6
N$55
  Top 0.61: J14.CC1 72.9,39.12 73.54,39.76 JP14.4
N$56
  Top 0.61: J14.CC2 72.9,38.12 73.8,37.22 JP14.3
N$57
  Top 0.61: JP15.2 92.8,34.68 92.41,35.06 92.41,36.08 91.39,37.1 J15.VBUS_2 88.73,37.1 88.35,37.48 88.35,39.76 88.73,40.14 J15.VBUS 91.2,40.14 92.41,41.35 92.41,41.92 92.8,42.3 JP15.5
N$58
  Top 0.61: JP15.1 92.03,32.14 91.65,32.52 91.65,35.57 91.35,35.87 J15.GND_2 88.56,35.87 87.46,36.97 87.46,40.14 88.69,41.37 J15.GND 91.35,41.37 91.65,41.67 91.65,44.21 92.29,44.84 JP15.6
N$59
  Top 0.61: J15.CC1 91.9,39.12 92.54,39.76 JP15.4
N$60
  Top 0.61: J15.CC2 91.9,38.12 92.8,37.22 JP15.3
N$61
  Top 0.61: JP16.2 13.79,10.68 13.41,11.06 13.41,12.08 12.39,13.1 J16.VBUS_2 9.73,13.1 9.35,13.48 9.35,15.76 9.73,16.14 J16.VBUS 12.2,16.14 13.41,17.35 13.41,17.92 13.79,18.3 JP16.5
N$62
  Top 0.61: JP16.1 13.03,8.14 12.65,8.52 12.65,11.57 12.35,11.87 J16.GND_2 9.56,11.87 8.46,12.97 8.46,16.14 9.69,17.37 J16.GND 12.35,17.37 12.65,17.67 12.65,20.21 13.29,20.84 JP16.6
N$63
  Top 0.61: J16.CC1 12.9,15.12 13.54,15.76 JP16.4
N$64
  Top 0.61: J16.CC2 12.9,14.12 13.79,13.22 JP16.3
N$65
  Top 0.61: JP17.2 33.8,10.68 33.41,11.06 33.41,12.08 32.39,13.1 J17.VBUS_2 29.73,13.1 29.35,13.48 29.35,15.76 29.73,16.14 J17.VBUS 32.2,16.14 33.41,17.35 33.41,17.92 33.8,18.3 JP17.5
N$66
  Top 0.61: JP17.1 33.03,8.14 32.65,8.52 32.65,11.57 32.35,11.87 J17.GND_2 29.56,11.87 28.46,12.97 28.46,16.14 29.69,17.37 J17.GND 32.35,17.37 32.65,17.67 32.65,20.21 33.29,20.84 JP17.6
N$67
  Top 0.61: J17.CC1 32.9,15.12 33.54,15.76 JP17.4
N$68
  Top 0.61: J17.CC2 32.9,14.12 33.8,13.22 JP17.3
N$69
  Top 0.61: JP18.2 53.8,10.68 53.41,11.06 53.41,12.08 52.39,13.1 J18.VBUS_2 49.73,13.1 49.35,13.48 49.35,15.76 49.73,16.14 J18.VBUS 52.2,16.14 53.41,17.35 53.41,17.92 53.8,18.3 JP18.5
N$70
  Top 0.61: JP18.1 53.03,8.14 52.65,8.52 52.65,11.57 52.35,11.87 J18.GND_2 49.56,11.87 48.46,12.97 48.46,16.14 49.69,17.37 J18.GND 52.35,17.37 52.65,17.67 52.65,20.21 53.29,20.84 JP18.6
N$71
  Top 0.61: J18.CC1 52.9,15.12 53.54,15.76 JP18.4
N$72
  Top 0.61: J18.CC2 52.9,14.12 53.8,13.22 JP18.3
N$73
  Top 0.61: JP19.2 73.8,10.68 73.41,11.06 73.41,12.08 72.39,13.1 J19.VBUS_2 69.73,13.1 69.35,13.48 69.35,15.76 69.73,16.14 J19.VBUS 72.2,16.14 73.41,17.35 73.41,17.92 73.8,18.3 JP19.5
N$74
  Top 0.61: JP19.1 73.03,8.14 72.65,8.52 72.65,11.57 72.35,11.87 J19.GND_2 69.56,11.87 68.46,12.97 68.46,16.14 69.69,17.37 J19.GND 72.35,17.37 72.65,17.67 72.65,20.21 73.29,20.84 JP19.6
N$75
  Top 0.61: J19.CC1 72.9,15.12 73.54,15.76 JP19.4
N$76
  Top 0.61: J19.CC2 72.9,14.12 73.8,13.22 JP19.3
N$77
  Top 0.61: JP20.2 92.8,10.68 92.41,11.06 92.41,12.08 91.39,13.1 J20.VBUS_2 88.73,13.1 88.35,13.48 88.35,15.76 88.73,16.14 J20.VBUS 91.2,16.14 92.41,17.35 92.41,17.92 92.8,18.3 JP20.5
N$78
  Top 0.61: JP20.1 92.03,8.14 91.65,8.52 91.65,11.57 91.35,11.87 J20.GND_2 88.56,11.87 87.46,12.97 87.46,16.14 88.69,17.37 J20.GND 91.35,17.37 91.65,17.67 91.65,20.21 92.29,20.84 JP20.6
N$79
  Top 0.61: J20.CC1 91.9,15.12 92.54,15.76 JP20.4
N$80
  Top 0.61: J20.CC2 91.9,14.12 92.8,13.22 JP20.3

## Text on the board
bPlace: 1.0 | 1.0 | 1.0 | 1.0 | 1.0 | GND | GND | GND | GND | GND | VBUS | VBUS | VBUS | VBUS | VBUS | CC1 | CC1 | CC1 | CC1 | CC1 | CC2 | CC2 | CC2 | CC2 | CC2 | VBUS | VBUS | VBUS | VBUS | VBUS | GND | GND | GND | GND | GND | 7.0 | 2.0 | 3.5 | 7.0 | 2.0 | 3.5 | 7.0 | 2.0 | 3.5 | 7.0 | 2.0 | 3.5 | 7.0 | 2.0 | 3.5 | 1.0 | 1.0 | 1.0 | 1.0 | 1.0 | GND | GND | GND | GND | GND | VBUS | VBUS | VBUS | VBUS | VBUS | CC1 | CC1 | CC1 | CC1 | CC1 | CC2 | CC2 | CC2 | CC2 | CC2 | VBUS | VBUS | VBUS | VBUS | VBUS | GND | GND | GND | GND | GND | 7.0 | 2.0 | 3.5 | 7.0 | 2.0 | 3.5 | 7.0 | 2.0 | 3.5 | 7.0 | 2.0 | 3.5 | 7.0 | 2.0 | 3.5 | 1.0 | 1.0 | 1.0 | 1.0 | 1.0 | GND | GND | GND | GND | GND | VBUS | VBUS | VBUS | VBUS | VBUS | CC1 | CC1 | CC1 | CC1 | CC1 | CC2 | CC2 | CC2 | CC2 | CC2 | VBUS | VBUS | VBUS | VBUS | VBUS | GND | GND | GND | GND | GND | 7.0 | 2.0 | 3.5 | 7.0 | 2.0 | 3.5 | 7.0 | 2.0 | 3.5 | 7.0 | 2.0 | 3.5 | 7.0 | 2.0 | 3.5 | 1.0 | 1.0 | 1.0 | 1.0 | 1.0 | GND | GND | GND | GND | GND | VBUS | VBUS | VBUS | VBUS | VBUS | CC1 | CC1 | CC1 | CC1 | CC1 | CC2 | CC2 | CC2 | CC2 | CC2 | VBUS | VBUS | VBUS | VBUS | VBUS | GND | GND | GND | GND | GND | 7.0 | 2.0 | 3.5 | 7.0 | 2.0 | 3.5 | 7.0 | 2.0 | 3.5 | 7.0 | 2.0 | 3.5 | 7.0 | 2.0 | 3.5